# EAGLE board PIPO (EAGLE 9.7.0)

Size 162.26 x 78.89 mm. Coordinates in mm from the lower left corner, seen from the top.
Outline: 0,0 162.26,0 162.26,78.89 0,78.89 0,0
Copper layers (1*16): Top 0.035mm / dielectric 1.5mm / Bottom 0.035mm
Design rules "default": minimum track width 6mil, minimum drill 0.35mm, track to track 6mil, track to pad 6mil, pad to pad 6mil, via to via 6mil, smd to smd 6mil, copper to edge 40mil, drill to drill 6mil, minimum pad ring 10mil, minimum via ring 8mil, stop-mask expansion 4mil, vias tented up to drill 0mil, thermal gap 10mil

## Footprints (pad centres in the part's own frame; a part is rotated, then mirrored left to right if it is on the bottom)
LEDRD254W60D565H860B = drill 0.981 pad 1.581: 1 -1.27,0; 2 1.27,0
BATTERY-GENERIC = drill 1.118 pad 3.15 octagon: + 2.54,0; - -2.54,0
RESAD1016W63L850D250B = drill 0.83 pad 1.43: 1 -5.08,0; 2 5.08,0
SWITCH-SPDT-PTH-8.5X3.7MM = drill 1.016 pad 1.88: 1 -2.54,0; 2 0,0; 3 2.54,0
78B04ST = drill 0.8: 1 -3.81,-3.81; 2 -1.27,-3.81; 3 1.27,-3.81; 4 3.81,-3.81; 5 3.81,3.81; 6 1.27,3.81; 7 -1.27,3.81; 8 -3.81,3.81
DIP762W53P254L1969H508Q14B = drill 0.743 pad 1.343: 1 -3.81,7.62; 2 -3.81,5.08; 3 -3.81,2.54; 4 -3.81,0; 5 -3.81,-2.54; 6 -3.81,-5.08; 7 -3.81,-7.62; 8 3.81,-7.62; 9 3.81,-5.08; 10 3.81,-2.54; 11 3.81,0; 12 3.81,2.54; 13 3.81,5.08; 14 3.81,7.62

## Placement (x,y rotation side)
D1  RED  [LEDRD254W60D565H860B]  116.56,70.98 180 top
D2  RED  [LEDRD254W60D565H860B]  129.26,70.98 180 top
D3  RED  [LEDRD254W60D565H860B]  141.96,70.98 180 top
D4  RED  [LEDRD254W60D565H860B]  154.66,70.98 180 top
P1  BATTERYGENERIC  [BATTERY-GENERIC]  8.26,8.26 180 top
R1  1k  [RESAD1016W63L850D250B]  117.83,55.74 90 top
R2  1k  [RESAD1016W63L850D250B]  130.53,55.74 90 top
R3  1k  [RESAD1016W63L850D250B]  143.23,55.74 90 top
R4  1k  [RESAD1016W63L850D250B]  155.93,55.74 90 top
S1  TOGGLE  [SWITCH-SPDT-PTH-8.5X3.7MM]  21.31,43.04 0 top
SW1  SPST-478B04ST  [78B04ST]  9.88,57.01 0 top
U1  74HC74_PDIP  [DIP762W53P254L1969H508Q14B]  36.55,57.01 90 top
U2  74HC74_PDIP  [DIP762W53P254L1969H508Q14B]  92.43,57.01 90 top

## Library data of the parts
D1-D4 = Tinkercad; CATEGORY: Opto-Electronic; SUB-CATEGORY: LED; VALUE: LED_RED
P1 R1-R4 S1 SW1 U1 U2 = Tinkercad

## Nets
D1_A: D1.1 R1.2
D2_A: D2.1 R2.2
D3_A: D3.1 R3.2
D4_A: D4.1 R4.2
P1+: P1.+ S1.1 SW1.5 SW1.6 SW1.7 SW1.8 U1.1 U1.4 U1.10 U1.13 U1.14 U2.1 U2.4 U2.10 U2.13 U2.14
P1-: D1.2 D2.2 D3.2 D4.2 P1.- S1.3 U1.7 U2.7
U1_1Q: R1.1 U1.5
U1_2Q: R2.1 U1.9
U1_CLK1: S1.2 U1.3 U1.11 U2.3 U2.11
U1_D1: SW1.1 U1.2
U1_D2: SW1.2 U1.12
U2_1Q: R3.1 U2.5
U2_2Q: R4.1 U2.9
U2_D1: SW1.3 U2.2
U2_D2: SW1.4 U2.12

## Tracks (layer width: path | path; a pad name or v marks a point on that pad's centre or on a via)
D1_A  (1 unrouted)
D2_A  (1 unrouted)
D3_A  (1 unrouted)
D4_A  (1 unrouted)
P1+  (15 unrouted)
P1-  (7 unrouted)
U1_1Q  (1 unrouted)
U1_2Q  (1 unrouted)
U1_CLK1  (4 unrouted)
U1_D1  (1 unrouted)
U1_D2  (1 unrouted)
U2_1Q  (1 unrouted)
U2_2Q  (1 unrouted)
U2_D1  (1 unrouted)
U2_D2  (1 unrouted)